# Altium PCB Poweramplifier_PCB_design.PcbDoc
Units mm, origin at the board's own origin, x right, y up, seen from the top; angles counter-clockwise.
Board outline 96.52 x 74.3 mm, 2 copper layers (Top Layer, Bottom Layer); 23 components, 15 nets, 54 pads, 0 vias.
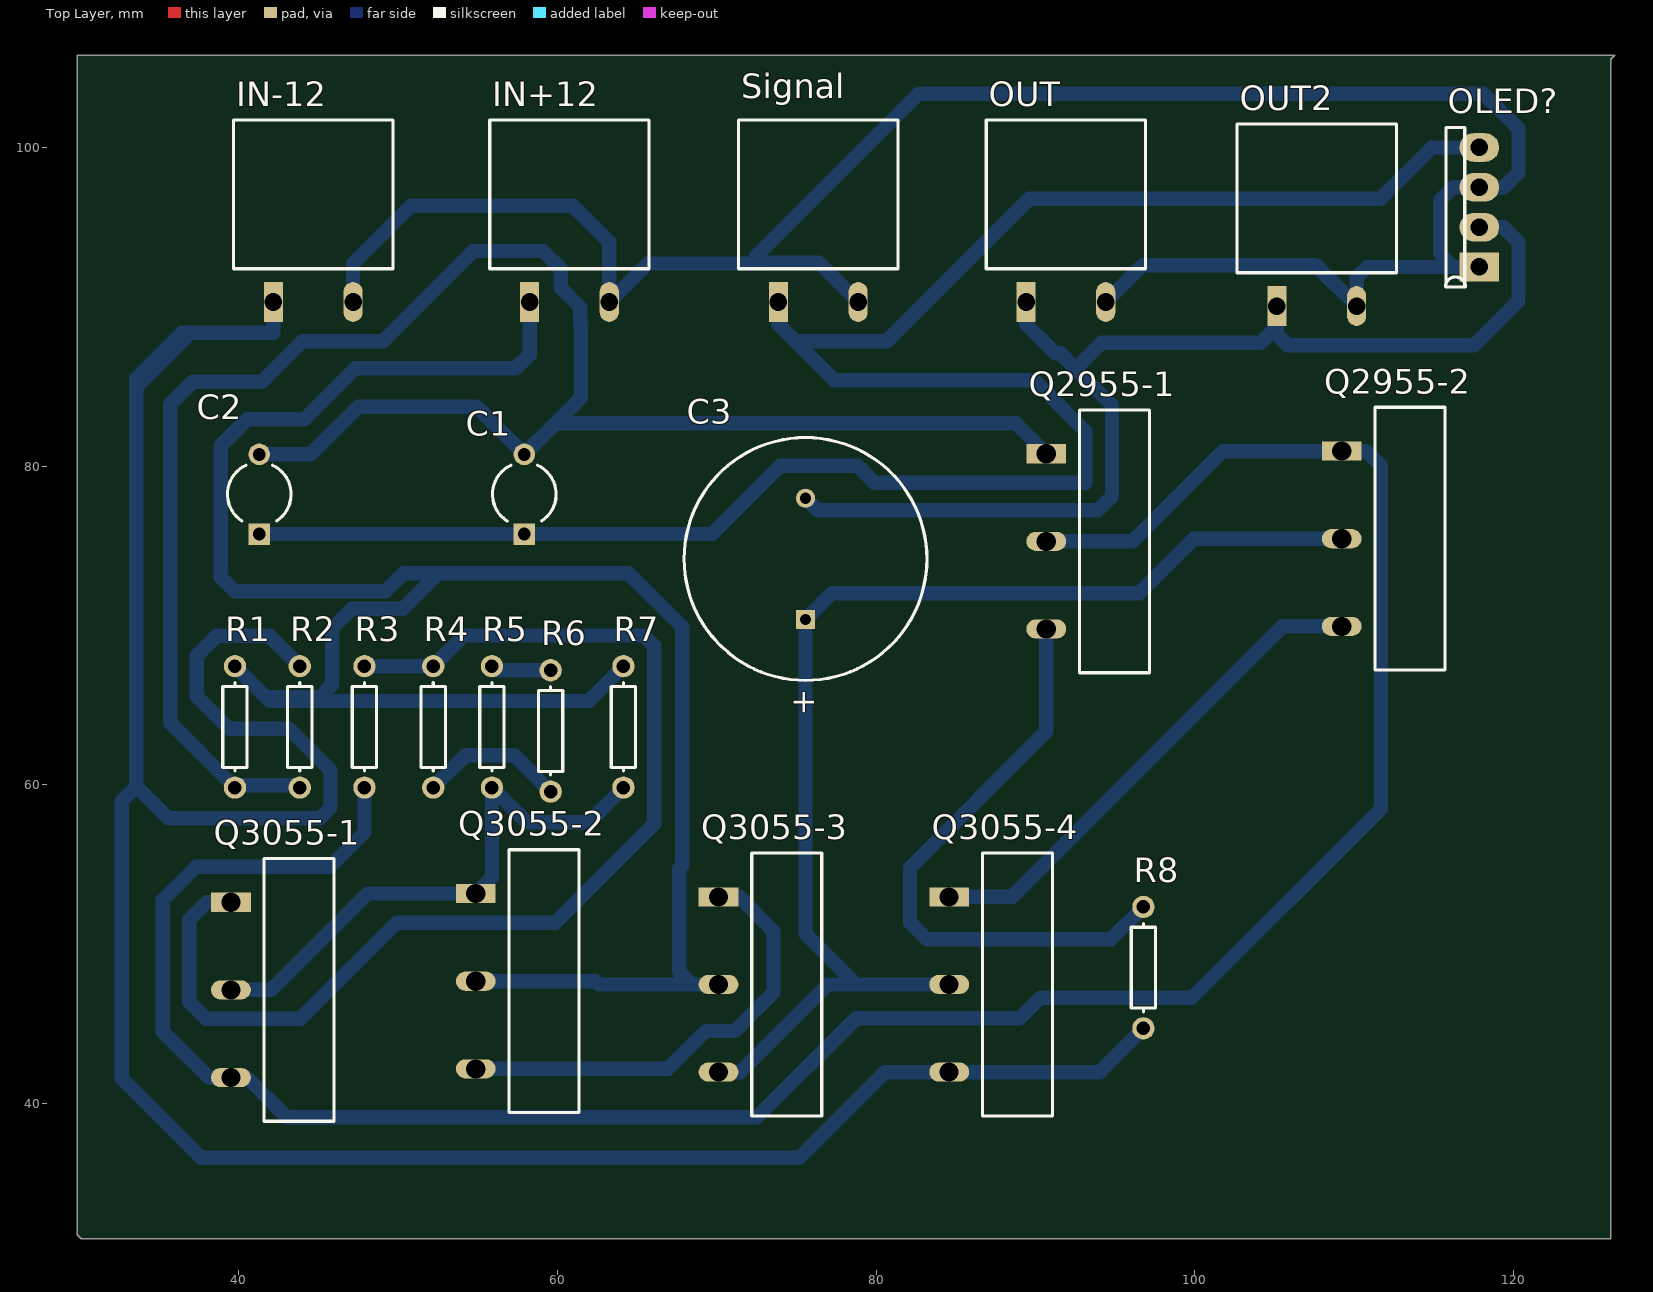
[diagram p0: Top Layer view]
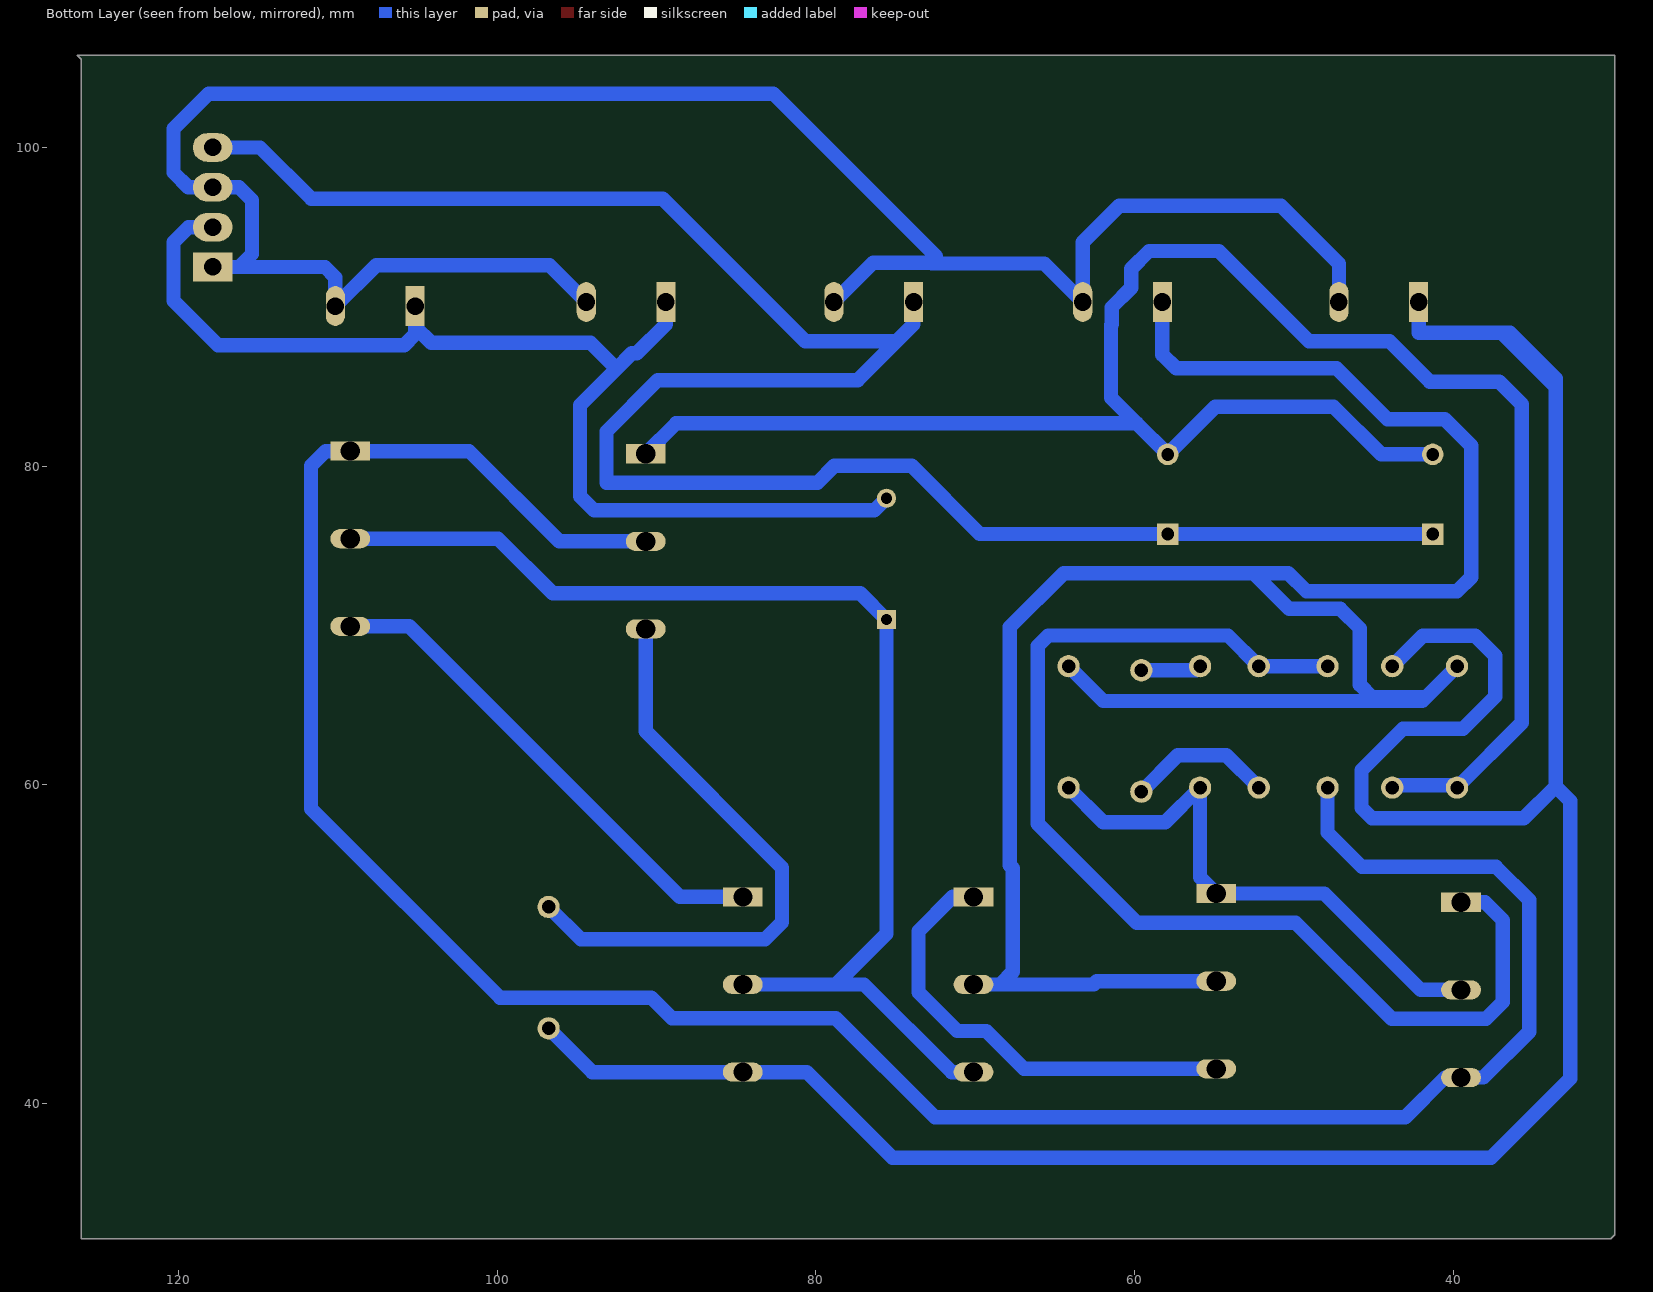
[diagram p1: Bottom Layer view, seen from below]

## Layer stack, top to bottom
Top Solder: solder mask 0.0102, Solder Resist, Dk 3.5
Top Layer: signal copper 0.0356
Dielectric 1: dielectric 0.32, FR-4, Dk 4.8
Bottom Layer: signal copper 0.0356
Bottom Solder: solder mask 0.0102, Solder Resist, Dk 3.5

## Board outline
29.845,105.791 126.365,105.791 126.111,105.537 126.111,31.496 30.099,31.496 29.845,31.75

## Design rules (kind name [scope] priority, off if disabled: settings)
Clearance [All] p1: gap=0.762 ignorepadtopadclearanceinfootprint=FALSE except(0: Text-Hole; 0.254: Text-Text)
PolygonConnect [All] p1: connectstyle=Relief reliefconductorwidth=0.254 reliefentries=4 polygonreliefangle="90 Angle" airgapwidth=0.254
RoomDefinition poweramplifier [InComponentClass('poweramplifier')] p1: confinementstyle=ConfineIn formatcopy=TRUE lockcomponents=FALSE outline 29.845,31.496 126.238,31.496 126.238,105.791 29.845,105.791
RoutingLayers [All] p1: top layer_v5=FALSE bottom layer_v5=TRUE
RoutingVias [All] p1: holewidth=0.711 width=1.27 viastyle="Through Hole" minholewidth=0.711 minwidth=1.27 maxholewidth=0.711 maxwidth=1.27
SolderMaskExpansion [All] p1: expansion=0.102
Width [All] p1: maxlimit=1 minlimit=0.254 preferedwidth=0.9 toplayer_maxwidth=0.254 toplayer_prefwidth=0.254 bottomlayer_minwidth=0.8 minimp=50.000000 maximp=50.000000 favimp=50.000000
29 further rules are at their usual default settings.

## Components (designator, comment, footprint, x,y, rotation, side; value= is the part's Value field where it differs from the comment)
C1 "Cap2" CAPR5-4X5 57.912,78.232 r90 top value=4.7uF
C2 "Cap2" CAPR5-4X5 41.275,78.232 r90 top value=4.7uF
C3 "Cap Pol1" RB7.6-15 75.565,74.168 r270 top value=4700uF
IN+12 "Component_1" ConnectorBlue 58.246,90.297 r90 top
IN-12 "Component_1" ConnectorBlue 42.164,90.297 r90 top
OLED? "OLED" OLEDHEADER 117.856,92.496 r180 top
OUT "Component_1" ConnectorBlue 89.408,90.297 r90 top
OUT2 "Component_1" ConnectorBlue 105.156,90.043 r90 top
Q2955-1 "Component_1" TIP2955 90.678,80.772 r0 top
Q2955-2 "Component_1" TIP2955 109.22,80.938 r0 top
Q3055-1 "Component_1" TIP2955 39.497,52.617 r0 top
Q3055-2 "Component_1" TIP2955 54.864,53.164 r0 top
Q3055-3 "Component_1" TIP2955 70.104,52.959 r0 top
Q3055-4 "Component_1" TIP2955 84.582,52.959 r0 top
R1 "Res1" AXIAL-0.3 39.751,63.627 r90 top value=22k
R2 "Res1" AXIAL-0.3 43.815,63.627 r270 top value=15k
R3 "Res1" AXIAL-0.3 47.879,63.627 r90 top value=4.7K
R4 "Res1" AXIAL-0.3 52.197,63.627 r270 top value=1.5K
R5 "Res1" AXIAL-0.3 55.88,63.627 r270 top value=5.6K
R6 "Res1" AXIAL-0.3 59.563,63.373 r90 top value=1.2K
R7 "Res1" AXIAL-0.3 64.135,63.627 r90 top value=10K
R8 "Res1" AXIAL-0.3 96.774,48.514 r90 top value=4.7K
Signal "Component_1" ConnectorBlue 73.867,90.297 r90 top

## Footprints (in the part's own frame and the unit in brackets; to place one, negate y for a bottom-side part, rotate by r counter-clockwise, add the part's x,y. Pads: shape width x height; smd on the part's side, far side on the other; paste and mask are expansions set on the pad)
AXIAL-0.3 [mm] "Axial Device, Thru-Hole; 2 Leads; 0.3 in Pin Spacing"
  round 1.4 hole 0.85: 1(-3.81,0) 2(3.81,0)
  silkscreen extent -2.77,-0.76 2.77,0.76
CAPR5-4X5 [mm] "Capacitor; 2 Leads"
  rect 1.35x1.35 hole 0.8: 1(-2.5,0)
  round 1.35 hole 0.8: 2(2.5,0)
  silkscreen extent -1.69,-2 1.82,2
ConnectorBlue [mm]
  rect 2.5x1.2 hole 1.1: 1(0,0)
  oval 2.5x1.2 hole 1.1: 2(0,-5)
  silkscreen extent 2.08,-7.5 11.43,2.5
OLEDHEADER [mm]
  rect 2.5x1.8 hole 1.1: 1(0,0)
  oval 2.5x1.8 hole 1.1: 2(0,-2.5) 3(0,-5) 4(0,-7.5)
  silkscreen extent 0.87,-8.75 2.13,1.25, body extent -1.27,-8.89 1.91,1.27, height 9
RB7.6-15 [mm] "Polarized Capacitor (Radial); 2 Leads"
  rect 1.2x1.2 hole 0.7: 1(3.81,0)
  round 1.2 hole 0.7: 2(-3.81,0)
  silkscreen extent -7.62,-7.62 7.62,7.62
TIP2955 [mm]
  rect 2.5x1.2 hole 1.2: 1(0,0)
  oval 2.5x1.2 hole 1.2: 2(0,-5.5) 3(0,-11)
  silkscreen extent 2.08,-13.75 6.48,2.75

## Part data
C1 C2: "Capacitor", PackageDescription="Capacitor; 2 Leads", PackageReference=CAPR5-4X5, Published=23-Sep-2002, Publisher="Altium Limited"
C3: "Polarized Capacitor (Radial)", LatestRevisionDate=17-Jul-2002, LatestRevisionNote="Re-released for DXP Platform.", PackageDescription="Polarized Capacitor (Radial); 2 Leads", PackageReference=RB7.6-15, Published=8-Jun-2000, Publisher="Altium Limited"
R1 R2 R3 R4 R5 R6 R7 R8: "Resistor", LatestRevisionDate=17-Jul-2002, LatestRevisionNote="Re-released for DXP Platform.", PackageDescription="Axial Device, Thru-Hole; 2 Leads; 0.3 in Pin Spacing", PackageReference=AXIAL-0.3, Published=8-Jun-2000, Publisher="Altium Limited"

## Nets (pads, with @x,y where several pads share a name; then routed paths per layer and width w, separated by ;. In a path a pad name is that pad's centre, name@x,y a point inside that pad or via, vN(x,y) a via of type N, cw(c..) or ccw(c..) an arc to the next point about the centre after c; other vN are vias at no path point)
GND: IN+12.2 IN-12.2 OLED?.1 OLED?.3 OUT2.2 OUT.2 Signal.2 | length 136.2
  Bottom Layer w0.9: IN-12.2 47.164,92.706 50.8,96.342 60.96,96.342 63.246,94.056 IN+12.2 65.659,92.71 72.716,92.71 72.765,92.759 76.405,92.759 Signal.2 ; 72.462,92.759 72.462,93.163 82.677,103.378 118.11,103.378 120.32,101.168 120.32,98.425 119.391,97.496 OLED?.3 116.205,97.496 115.392,96.683 115.392,93.309 116.205,92.496 ; OUT.2 96.719,92.608 107.591,92.608 OUT2.2 110.156,91.839 110.813,92.496 116.205,92.496 ; OLED?.1 116.205,92.496
NetC1_1: C1.1 C2.1 OLED?.4 Signal.1 | length 128.7
  Bottom Layer w0.9: C2.1 C1.1 69.704,75.732 73.982,80.01 78.842,80.01 79.892,78.96 93.14,78.96 93.14,82.171 89.916,85.395 77.372,85.395 74.934,87.833 ; Signal.1 73.867,88.9 74.934,87.833 ; OLED?.4 114.883,99.996 111.661,96.774 89.611,96.774 80.67,87.833 74.934,87.833
NetC1_2: C1.2 C2.2 Q2955-1.1 R1.1 R2.2 | length 123.2
  Bottom Layer w0.9: C2.2 44.516,80.732 47.502,83.718 54.926,83.718 C1.2 59.857,82.677 ; R2.2 43.673,59.959 39.893,59.959 R1.1 35.687,63.881 35.687,83.871 37.109,85.293 41.453,85.293 43.993,87.833 49.047,87.833 54.712,93.497 59.08,93.497 60.198,92.38 60.198,91.186 61.434,89.95 61.434,88.896 61.468,88.862 61.468,84.288 59.857,82.677 ; Q2955-1.1 88.773,82.677 59.857,82.677
NetC3_1: C3.1 Q2955-2.2 Q3055-3.3 Q3055-4.2 | length 76.7
  Bottom Layer w0.9: Q3055-3.3 71.476,41.959 76.976,47.459 78.74,47.459 ; Q3055-4.2 78.74,47.459 ; Q2955-2.2 99.949,75.438 96.52,72.009 77.216,72.009 C3.1 75.565,50.634 78.74,47.459
NetC3_2: C3.2 OLED?.2 OUT2.1 OUT.1 | length 73.2
  Bottom Layer w0.9: C3.2 76.327,77.216 93.913,77.216 94.802,78.105 94.802,83.82 92.516,86.106 ; OUT.1 89.408,88.9 91.237,87.071 91.551,87.071 92.516,86.106 ; OUT2.1 105.156,88.748 ; OLED?.2 119.38,94.996 120.32,94.056 120.32,90.373 117.526,87.579 105.842,87.579 105.156,88.265 105.156,88.748 ; 92.516,86.106 94.142,87.732 104.14,87.732 105.156,88.748
NetIN+12_1: IN+12.1 Q3055-2.2 Q3055-3.2 R1.2 R7.2 | length 145
  Bottom Layer w0.9: R1.2 41.681,65.507 ; Q3055-2.2 62.357,47.664 62.562,47.459 68.443,47.459 ; IN+12.1 58.246,86.995 57.382,86.131 47.317,86.131 44.116,82.931 40.513,82.931 38.862,81.28 38.862,73.025 39.751,72.136 49.2,72.136 50.343,73.279 52.527,73.279 ; R7.2 61.951,65.253 41.935,65.253 41.681,65.507 ; Q3055-3.2 68.443,47.459 ; 41.681,65.507 45.085,65.507 45.847,66.269 45.847,69.799 47.092,71.044 50.292,71.044 52.527,73.279 ; 52.527,73.279 64.44,73.279 67.818,69.901 67.818,54.938 67.642,54.762 67.642,48.26 68.443,47.459
NetIN-12_1: IN-12.1 Q3055-4.3 R2.1 R8.1 | length 166.7
  Bottom Layer w0.9: IN-12.1 42.164,88.367 36.957,88.367 ; R2.1 41.903,69.349 38.608,69.349 37.36,68.101 37.36,65.532 39.381,63.511 43.144,63.511 45.745,60.909 45.745,58.547 45.085,57.887 35.56,57.887 33.557,59.89 ; R8.1 94.029,41.959 Q3055-4.3 80.568,41.959 75.185,36.576 37.621,36.576 32.639,41.558 32.639,58.972 33.557,59.89 ; 33.557,59.89 33.557,84.966 ; 33.557,84.966 36.957,88.367 ; 33.557,84.966 33.557,85.5 36.424,88.367 36.957,88.367
NetQ2955-1_2: Q2955-1.2 Q2955-2.1 Q3055-1.3 R3.1 | length 157.5
  Bottom Layer w0.9: R3.1 47.879,56.998 45.72,54.839 37.302,54.839 35.219,52.756 35.219,44.498 38.1,41.617 Q3055-1.3 40.501,41.617 43.002,39.116 72.517,39.116 78.74,45.339 89.027,45.339 90.322,46.634 99.822,46.634 111.684,58.496 111.684,80.01 110.756,80.938 Q2955-2.1 101.766,80.938 96.1,75.272 Q2955-1.2
NetQ2955-1_3: Q2955-1.3 R8.2 | length 37.9
  Bottom Layer w0.9: Q2955-1.3 90.678,63.348 82.118,54.788 82.118,51.359 83.185,50.292 94.742,50.292 R8.2
NetQ2955-2_3: Q2955-2.3 Q3055-4.1 | length 31.7
  Bottom Layer w0.9: Q3055-4.1 88.544,52.959 105.523,69.938 Q2955-2.3
NetQ3055-1_1: Q3055-1.1 R3.2 R4.1 | length 73.3
  Bottom Layer w0.9: Q3055-1.1 37.998,52.617 36.881,51.5 36.881,46.355 37.931,45.305 43.857,45.305 49.887,51.335 59.86,51.335 66.065,57.54 66.065,68.707 65.405,69.367 54.127,69.367 R4.1 R3.2
NetQ3055-1_2: Q3055-1.2 Q3055-2.1 R5.2 R7.1 | length 35
  Bottom Layer w0.9: Q3055-1.2 42.037,47.117 48.084,53.164 Q3055-2.1 55.88,54.18 R5.2 58.064,57.633 61.951,57.633 R7.1
NetQ3055-2_3: Q3055-2.3 Q3055-3.1 | length 28.9
  Bottom Layer w0.9: Q3055-2.3 66.929,42.164 69.302,44.537 71.12,44.537 73.558,46.976 73.558,50.8 71.399,52.959 Q3055-3.1
NetR4_2: R4.2 R6.1 | length 9.2
  Bottom Layer w0.9: R4.2 54.229,61.849 57.277,61.849 R6.1
NetR5_1: R5.1 R6.2 | length 3.8
  Bottom Layer w0.9: R5.1 56.134,67.183 R6.2

## Text inside footprints (layer, text, board x,y; h text height)
C3: Top Overlay "+" at 74.828,66.036 h1.5 r270